# Altium PCB Line_trigger.PCBDOC (part 2 of 2)
Units mm, origin at the board's own origin, x right, y up, seen from the top; angles counter-clockwise.
Board outline 120 x 50.5 mm, 2 copper layers (TOP, BOT), stack 1.57 mm thick; 102 components, 41 nets, 280 pads, 76 vias.
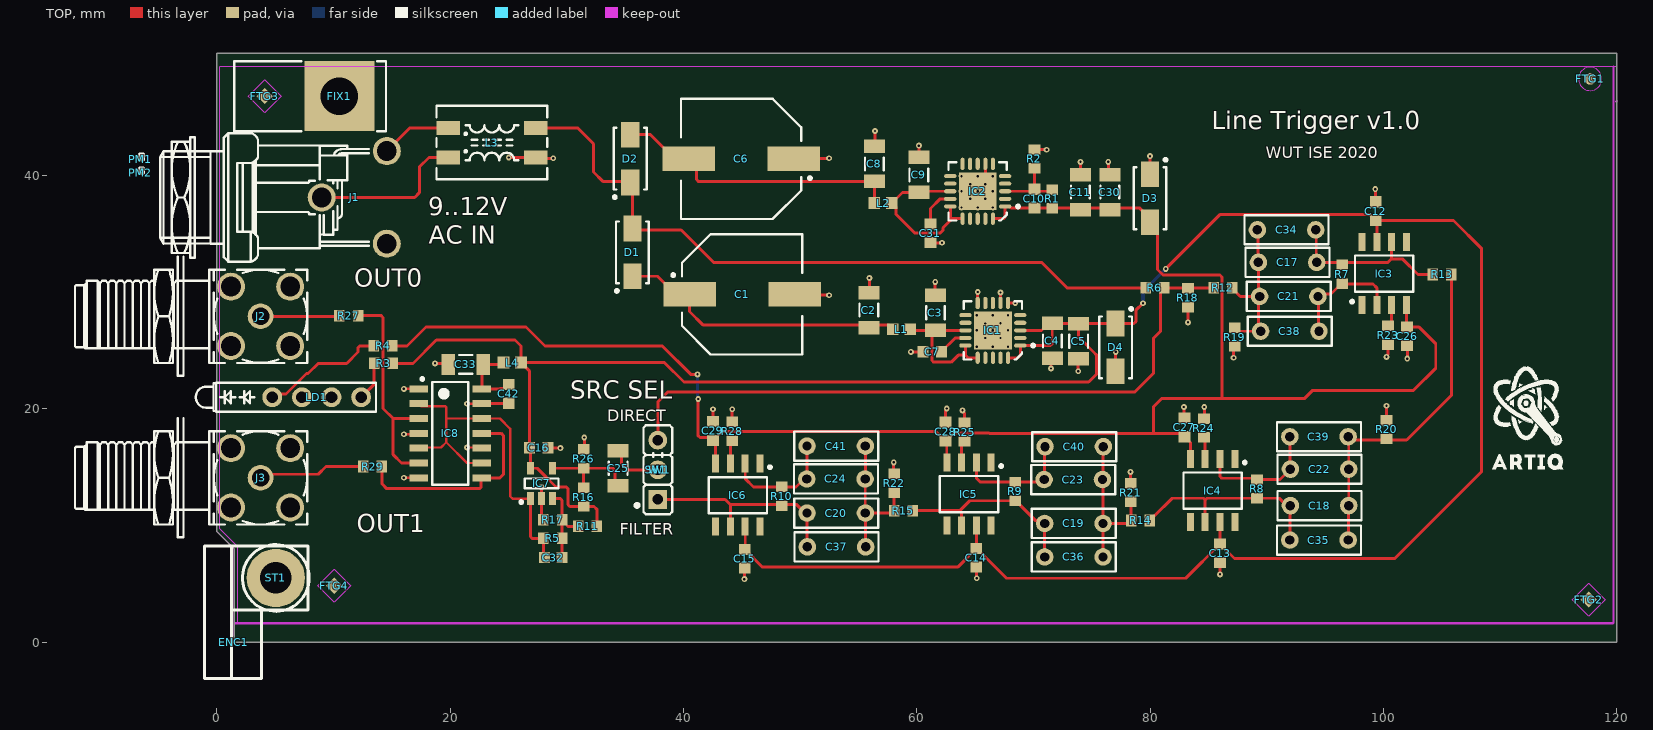
[diagram p0: TOP view]

## Via types
v1: diameter 0.5, hole 0.2, TOP to BOT, 76 vias

## Nets (pads, with @x,y where several pads share a name; then routed paths per layer and width w, separated by ;. In a path a pad name is that pad's centre, name@x,y a point inside that pad or via, vN(x,y) a via of type N, cw(c..) or ccw(c..) an arc to the next point about the centre after c; other vN are vias at no path point) (continued)
NetJ2_1: (continued)
  TOP w0.254: J2.1@3.799,27.991 J2.1 10.45,27.94 R27.2 ; R27.2@10.431,27.921 10.521,27.921 R27.2@10.824,27.618
NetJ3_1: J3.1 R29.2 | length 9.2
  TOP w0.254: J3.1 4.053,14.402 8.687,14.402 9.347,15.062 R29.2
NetLD1_1: LD1.1 R4.2 | length 10.7
  TOP w0.254: LD1.1 5.026,21.282 5.926,21.282 7.681,23.038 7.823,23.038 8.687,23.901 11.125,23.901 12.101,24.877 12.101,25.251 12.25,25.4 R4.2
NetLD1_4: LD1.4 R3.2 | length 3.4
  TOP w0.254: LD1.4 13.487,22.123 R3.2
NetR6_1: R6.1 R12.1 R18.2 W1.3 | length 58.7
  TOP w0.254: W1.3 37.795,20.599 38.659,21.463 78.689,21.463 80.295,23.069 80.295,26.082 80.871,26.658 80.871,30.005 81.244,30.378 83.236,30.378 R12.1
P5V0A: C4.2 C5.2 C12.1 C13.1 C14.1 C15.1 C16.1 D4.1 IC1.1 IC1.3 IC1.20 IC3.7 IC4.7 IC5.7 IC6.7 IC7.5 L4.1 R3.1 R11.1 R16.2 | length 237.2
  TOP w0.254: R3.1 16.802,23.901 18.809,25.908 25.566,25.908 26.074,25.4 L4.1 ; R11.1 32.569,11.405 32.328,11.646 R16.2 30.254,11.646 30.106,11.795 30.106,13.161 29.957,13.309 29.07,13.309 27.465,14.914 IC7.5 26.884,16.563 C16.1 26.784,23.267 L4.1 ; IC6.7 45.288,8.014 C15.1 46.761,6.439 63.5,6.439 C14.1 ; IC5.7 C14.1 ; IC1.20 68.637,24.382 68.864,24.609 IC1.1 71.446,25.432 71.603,25.588 C4.2 ; IC1.3 70.678,26.732 71.278,27.332 C4.2 ; C5.2 73.863,26.162 75.145,24.88 75.145,24.876 75.413,24.609 75.413,22.987 74.727,22.301 40.03,22.301 38.354,23.978 L4.1 ; v1(79.375,29.058) 78.765,28.448 78.765,27.481 78.617,27.332 C4.2 ; v1(81.331,32.004) 86.004,36.678 98.793,36.678 C12.1 ; IC4.7 C13.1 ; IC3.7 99.416,36.055 C12.1 ; C14.1 65.125,8.039 67.678,5.486 83.045,5.486 C13.1 ; C13.1 87.211,7.188 100.965,7.188 108.407,14.63 108.407,33.731 105.981,36.157 C12.1
  BOT w0.254: v1(79.375,29.058) 79.375,30.048 v1(81.331,32.004)
pads on no net: FIX1.1 FTG1.FTG2 FTG2.1 FTG3.1 FTG4.1 IC1.2 IC1.4 IC1.5 IC1.8 IC1.9 IC1.11 IC1.12 IC1.17 IC1.18 IC1.19 IC2.2 IC2.4 IC2.5 IC2.6 IC2.8 IC2.9 IC2.10 IC2.11 IC2.12 IC2.17 IC2.18 IC2.19 IC3.1 IC3.5 IC3.8 IC4.1 IC4.5 IC4.8 IC5.1 IC5.5 IC5.8 IC6.1 IC6.5 IC6.8 J1.3 ST1.0

## Polygon pours and split planes (outlines as drawn)
GND on BOT "GND_L02_P000" (solid, remove dead copper, pour order 0): 0.279,49.378 0.305,49.352 119.71,49.352 119.71,1.702 119.625,1.616 1.778,1.616 1.778,8.179 0.229,9.728 0.229,49.327

## Keep-outs
TOP:
  lines w0.2: 119.95,46.35 119.975,46.375
KeepOutLayer:
  lines w0.1: 1.5,0.51 1.5,8 0,9.5 0,50.5 8.5,50.5 ; 1.778,1.616 1.778,8.179 0.229,9.728 0.229,49.327 0.279,49.378 120,49.378 120,0.51 ; 10,0 105.791,0 ; 120,0.51 120,0.51
  lines w0.2: 1.45,1.616 119.625,1.616 119.71,1.702 119.71,49.352

## Silkscreen, mask and mechanical layers (free items; w line width, h text height)
TopOverlay:
  drawing of 542 lines, arcs and shapes, not listed
  text "Line Trigger v1.0" at 85.284,43.952 h1.52
  text "WUT ISE 2020" at 89.907,41.489 h1.02
  text "9..12V" at 18.11,36.601 h1.52
  text "AC IN" at 18.177,34.16 h1.52
  text "OUT0" at 11.786,30.48 h1.52
  text "SRC SEL" at 30.277,20.879 h1.52
  text "DIRECT" at 33.452,18.948 h1
  text "OUT1" at 11.989,9.423 h1.52
  text "FILTER" at 34.544,9.22 h1
BottomOverlay:
  drawing of 541 lines, arcs and shapes, not listed
  text "Line Trigger v1.0" at 95.656,44.78 h1.52
  text "WUT ISE 2020" at 91.034,42.316 h1.02
Mechanical1:
  lines w0.1: 0,14.5 0,9.5 1.5,8 1.5,0 120,0 120,50.5 ; 0,14.5 0,14.5 ; 0,14.5 0,22 0,50.5 9.038,50.5 9.038,50.5 120,50.5 ; 120,50.5 120,50.5

## Text inside footprints (layer, text, board x,y; h text height)
J1: Mechanical8 "2.5mm" at -1.008,41.425 h1 r270; Mechanical8 "SLEEVE SHUNT" at 7.967,33.9 h0.5; Mechanical8 "CENTER PIN" at 9.067,41.825 h0.5